# EAGLE board ssm_panelized (EAGLE 8.3.1)
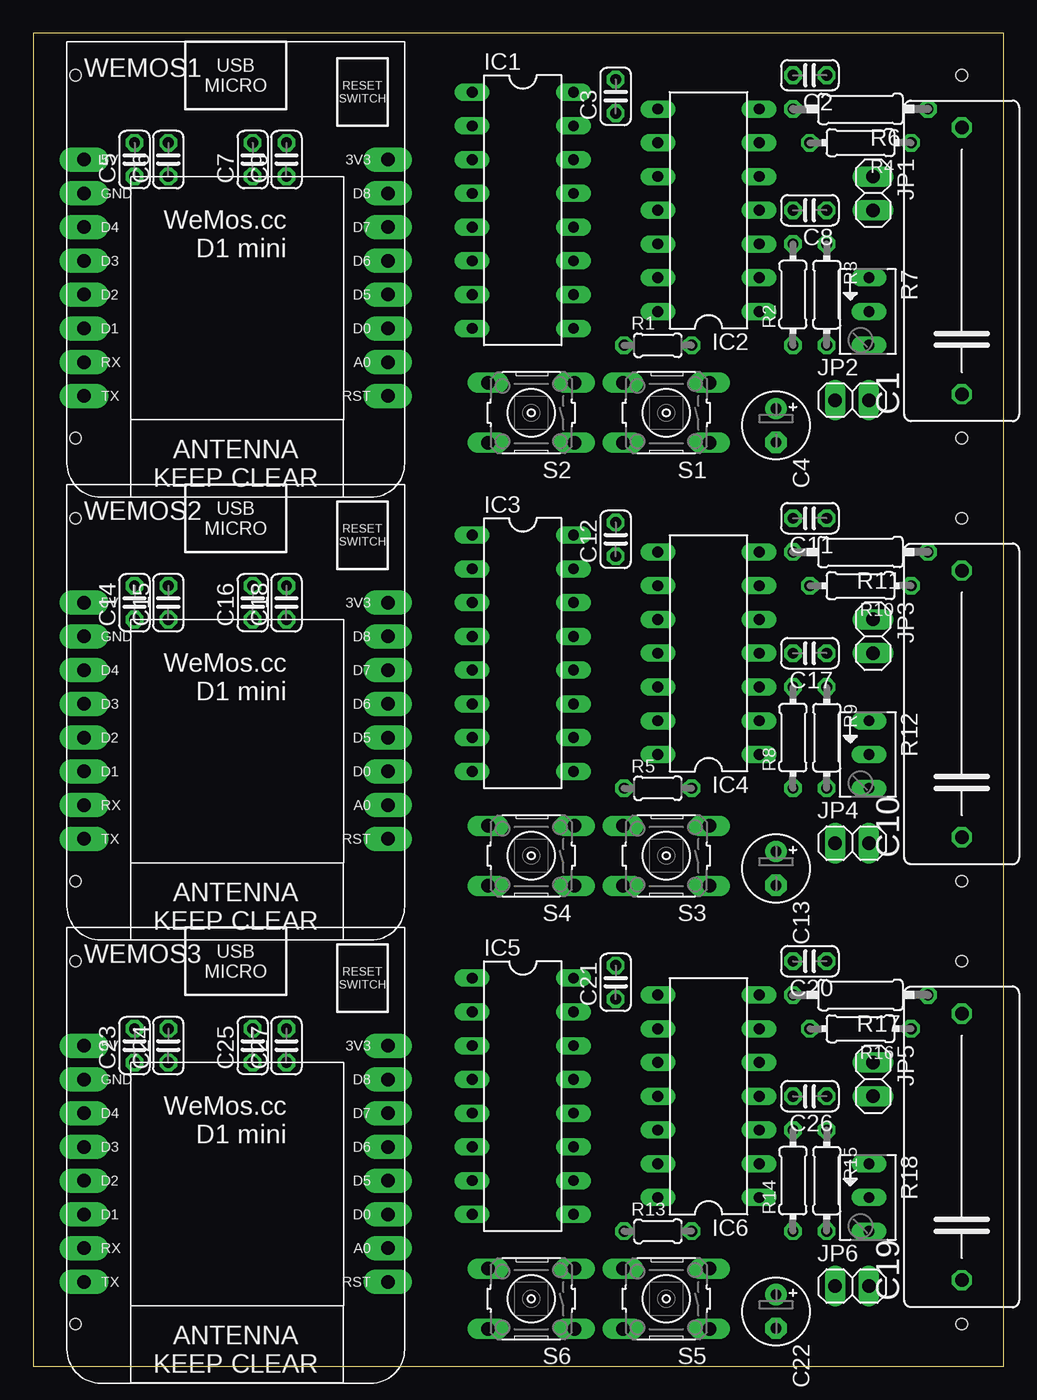
[diagram p0: board, top side]
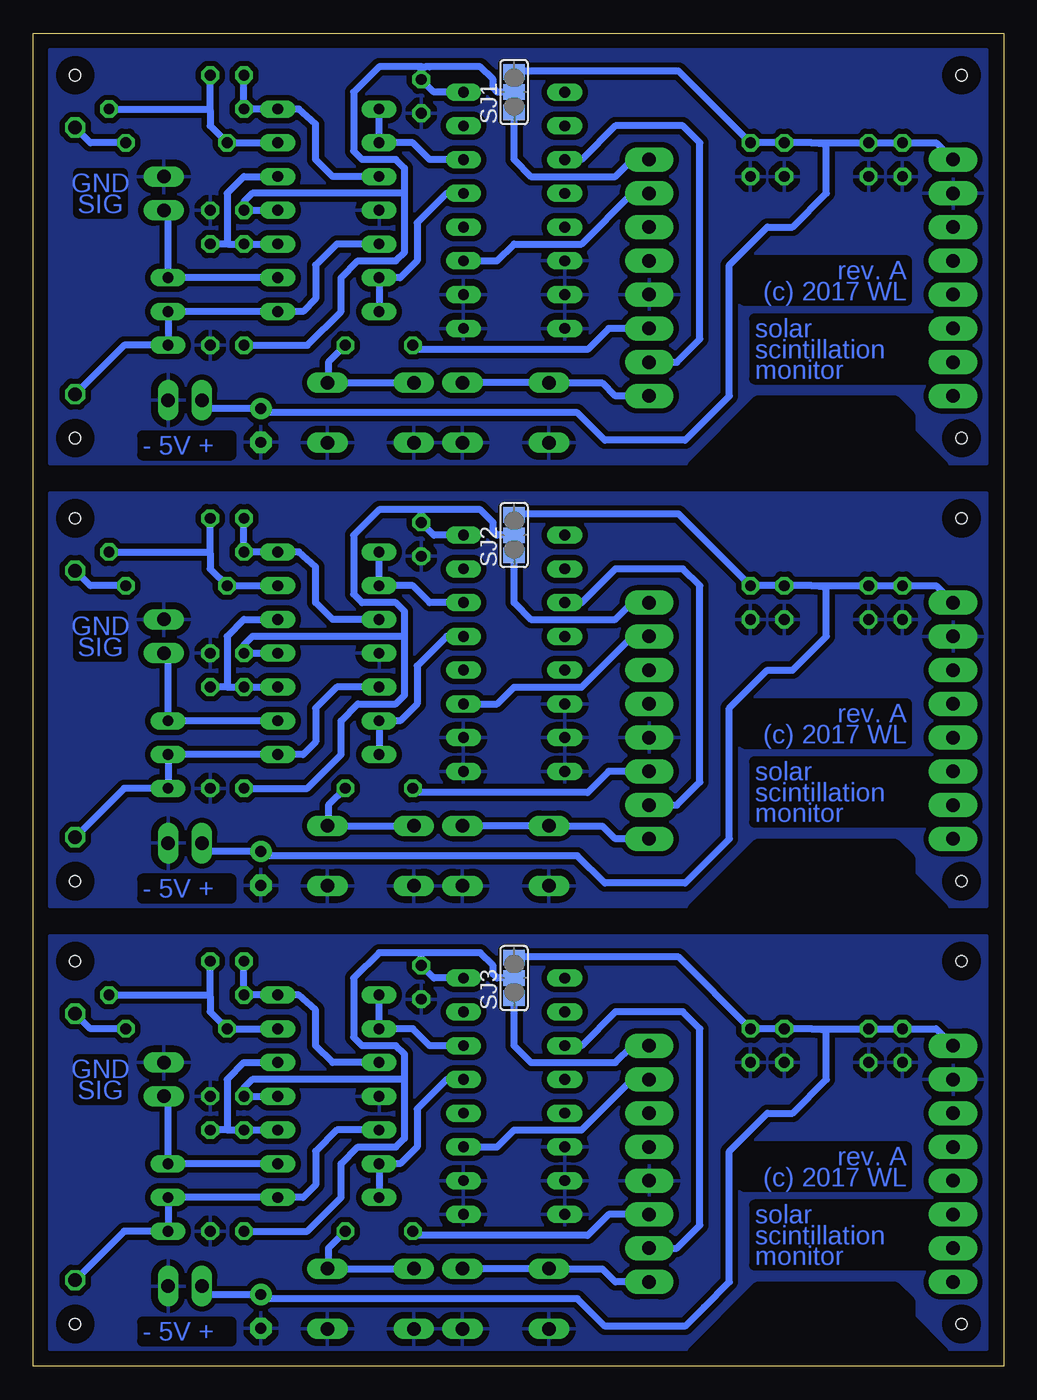
[diagram p1: board, bottom side, seen from below]

Size 73 x 100.32 mm. Coordinates in mm from the lower left corner, seen from the top.
Outline: 0,0 73,0 73,100.32 0,100.32 0,0
Copper layers (1*16): Top 0.035mm / dielectric 1.5mm / Bottom 0.035mm
Design rules "default *": minimum track width 6mil, minimum drill 0.35mm, track to track 6mil, track to pad 6mil, pad to pad 6mil, via to via 6mil, smd to smd 6mil, copper to edge 40mil, drill to drill 6mil, minimum pad ring 10mil, minimum via ring 8mil, stop-mask expansion 4mil, vias tented up to drill 0mil, thermal gap 20mil
Net classes: 0 default: clearance 0.205 mm
Holes 0.85 mm at 3.17,97.16 3.17,69.85 69.85,69.85 69.85,97.16 3.17,63.82 3.17,36.51 69.85,36.51 69.85,63.82 3.17,30.48 3.17,3.17 69.85,3.17 69.85,30.48
bRestrict: area 4.8,67.6 to 23.2,72.4; area 47.6,93 to 47.9,93.3; area 4.8,34.3 to 23.2,39.1; area 47.6,59.7 to 47.9,60; area 4.8,1 to 23.2,5.7; area 47.6,26.4 to 47.9,26.7

## Footprints (pad centres in the part's own frame; a part is rotated, then mirrored left to right if it is on the bottom)
C225-087X210 = drill 1.016 octagon: 1 -11.303,0; 2 8.763,0
C025-024X044 = drill 0.813 octagon: 1 -1.27,0; 2 1.27,0
E2,5-5 = drill 0.813 pad 1.6: + -1.27,0 | drill 0.813 pad 1.6 octagon: - 1.27,0
DIL16 = drill 0.813 long: 1 -8.89,-3.81; 2 -6.35,-3.81; 3 -3.81,-3.81; 4 -1.27,-3.81; 5 1.27,-3.81; 6 3.81,-3.81; 7 6.35,-3.81; 8 8.89,-3.81; 9 8.89,3.81; 10 6.35,3.81; 11 3.81,3.81; 12 1.27,3.81; 13 -1.27,3.81; 14 -3.81,3.81; 15 -6.35,3.81; 16 -8.89,3.81
DIL14 = drill 0.813 long: 1 -7.62,-3.81; 2 -5.08,-3.81; 3 -2.54,-3.81; 4 0,-3.81; 5 2.54,-3.81; 6 5.08,-3.81; 7 7.62,-3.81; 8 7.62,3.81; 9 5.08,3.81; 10 2.54,3.81; 11 0,3.81; 12 -2.54,3.81; 13 -5.08,3.81; 14 -7.62,3.81
1X02 = drill 1.016 long: 1 -1.27,0; 2 1.27,0
0204/5 = drill 0.813 octagon: 1 -2.54,0; 2 2.54,0
0204/7 = drill 0.813 octagon: 1 -3.81,0; 2 3.81,0
0207/10 = drill 0.813 octagon: 1 -5.08,0; 2 5.08,0
B64Y = drill 0.813 long: A 2.54,0; E -2.54,0; S 0,0
B3F-10XX = drill 1.016 long: 1 -3.251,2.261; 2 3.251,2.261; 3 -3.251,-2.261; 4 3.251,-2.261
SJ_2 = smd 1.168 x 1.6: 1 -1.524,0; 2 0,0; 3 1.524,0
WEMOS-D1-MINI = drill 1.016 pad 1.829 long: 3V3 -10.16,-10.16; 5V 12.7,-10.16; A0 -10.16,5.08; D0 -10.16,2.54; D1 12.7,2.54; D2 12.7,0; D3 12.7,-2.54; D4 12.7,-5.08; D5 -10.16,0; D6 -10.16,-2.54; D7 -10.16,-5.08; D8 -10.16,-7.62; GND 12.7,-7.62; RESET -10.16,7.62; RX 12.7,5.08; TX 12.7,7.62

## Placement (x,y rotation side)
C1  3.3u  [C225-087X210]  69.85,84.45 90 top
C2  20p  [C025-024X044]  58.42,97.16 180 top
C3  120p  [C025-024X044]  43.81,95.57 90 top
C4  470u  [E2,5-5]  55.88,70.8 270 top
C5  20p  [C025-024X044]  7.62,90.81 90 top
C6  120p  [C025-024X044]  10.16,90.81 90 top
C7  120p  [C025-024X044]  16.51,90.81 90 top
C8  120p  [C025-024X044]  58.42,87 180 top
C9  120p  [C025-024X044]  19.05,90.81 90 top
C10  3.3u  [C225-087X210]  69.85,51.12 90 top
C11  20p  [C025-024X044]  58.42,63.82 180 top
C12  120p  [C025-024X044]  43.81,62.23 90 top
C13  470u  [E2,5-5]  55.88,37.47 270 top
C14  20p  [C025-024X044]  7.62,57.47 90 top
C15  120p  [C025-024X044]  10.16,57.47 90 top
C16  120p  [C025-024X044]  16.51,57.47 90 top
C17  120p  [C025-024X044]  58.42,53.66 180 top
C18  120p  [C025-024X044]  19.05,57.47 90 top
C19  3.3u  [C225-087X210]  69.85,17.78 90 top
C20  20p  [C025-024X044]  58.42,30.48 180 top
C21  120p  [C025-024X044]  43.81,28.89 90 top
C22  470u  [E2,5-5]  55.88,4.13 270 top
C23  20p  [C025-024X044]  7.62,24.13 90 top
C24  120p  [C025-024X044]  10.16,24.13 90 top
C25  120p  [C025-024X044]  16.51,24.13 90 top
C26  120p  [C025-024X044]  58.42,20.32 180 top
C27  120p  [C025-024X044]  19.05,24.13 90 top
IC1  4051N  [DIL16]  36.83,87 270 top
IC2  MCP604P  [DIL14]  50.8,87 90 top
IC3  4051N  [DIL16]  36.83,53.66 270 top
IC4  MCP604P  [DIL14]  50.8,53.66 90 top
IC5  4051N  [DIL16]  36.83,20.32 270 top
IC6  MCP604P  [DIL14]  50.8,20.32 90 top
JP1  SENS  [1X02]  63.18,88.27 270 top
JP2  PWR  [1X02]  61.59,72.71 0 top
JP3  SENS  [1X02]  63.18,54.93 270 top
JP4  PWR  [1X02]  61.59,39.37 0 top
JP5  SENS  [1X02]  63.18,21.59 270 top
JP6  PWR  [1X02]  61.59,6.03 0 top
R1  470  [0204/5]  46.99,76.83 0 top
R2  10k  [0204/7]  57.15,80.64 90 top
R3  10k  [0204/7]  59.69,80.64 270 top
R4  47k  [0204/7]  62.23,92.08 180 top
R5  470  [0204/5]  46.99,43.5 0 top
R6  20M  [0207/10]  62.23,94.61 180 top
R7  1k  [B64Y]  62.87,79.38 270 top
R8  10k  [0204/7]  57.15,47.31 90 top
R9  10k  [0204/7]  59.69,47.31 270 top
R10  47k  [0204/7]  62.23,58.74 180 top
R11  20M  [0207/10]  62.23,61.28 180 top
R12  1k  [B64Y]  62.87,46.04 270 top
R13  470  [0204/5]  46.99,10.16 0 top
R14  10k  [0204/7]  57.15,13.97 90 top
R15  10k  [0204/7]  59.69,13.97 270 top
R16  47k  [0204/7]  62.23,25.4 180 top
R17  20M  [0207/10]  62.23,27.94 180 top
R18  1k  [B64Y]  62.87,12.7 270 top
S1  FLS  [B3F-10XX]  47.62,71.75 180 top
S2  RST  [B3F-10XX]  37.47,71.75 180 top
S3  FLS  [B3F-10XX]  47.62,38.42 180 top
S4  RST  [B3F-10XX]  37.47,38.42 180 top
S5  FLS  [B3F-10XX]  47.62,5.08 180 top
S6  RST  [B3F-10XX]  37.47,5.08 180 top
SJ1  V  [SJ_2]  36.83,95.89 90 bottom
SJ2  V  [SJ_2]  36.83,62.55 90 bottom
SJ3  V  [SJ_2]  36.83,29.21 90 bottom
WEMOS1  NODEMCU  [WEMOS-D1-MINI]  16.51,80.64 180 top
WEMOS2  NODEMCU  [WEMOS-D1-MINI]  16.51,47.31 180 top
WEMOS3  NODEMCU  [WEMOS-D1-MINI]  16.51,13.97 180 top

## Library data of the parts
C1 C10 C19 = Cap
C2-C9 C11-C18 C20-C27 R1 R5 R6 R11 R13 R17 = rcl
IC1 IC3 IC5 = 40xx
IC2 IC4 IC6 = linear
JP1-JP6 = pinhead
R2-R4 R8-R10 R14-R16 = resistor
R7 R12 R18 = pot
S1-S6 = switch-omron; MPN: B3F-1000; OC_FARNELL: 176432; OC_NEWARK: 36M3542
SJ1-SJ3 = jumper
WEMOS1-WEMOS3 = esp8266modules

## Nets
+3V1: SJ2.1 WEMOS2.3V3
+3V2: SJ3.1 WEMOS3.3V3
+3V3: SJ1.1 WEMOS1.3V3
+5V: C4.+ C5.2 C6.2 C7.2 C9.2 JP2.1 SJ1.3 WEMOS1.5V
+5V1: C13.+ C14.2 C15.2 C16.2 C18.2 JP4.1 SJ2.3 WEMOS2.5V
+5V2: C22.+ C23.2 C24.2 C25.2 C27.2 JP6.1 SJ3.3 WEMOS3.5V
A0: IC1.3 WEMOS1.A0
A1: IC3.3 WEMOS2.A0
A2: IC5.3 WEMOS3.A0
D0: R1.1 WEMOS1.D0
D1: R5.1 WEMOS2.D0
D2: R13.1 WEMOS3.D0
GND: C3.1 C4.- C5.1 C6.1 C7.1 C8.1 C9.1 IC1.6 IC1.7 IC1.8 IC1.9 IC1.10 IC2.11 JP1.1 JP2.2 R3.2 S1.1 S1.2 S2.1 S2.2 WEMOS1.D5 WEMOS1.GND
GND1: C12.1 C13.- C14.1 C15.1 C16.1 C17.1 C18.1 IC3.6 IC3.7 IC3.8 IC3.9 IC3.10 IC4.11 JP3.1 JP4.2 R9.2 S3.1 S3.2 S4.1 S4.2 WEMOS2.D5 WEMOS2.GND
GND2: C21.1 C22.- C23.1 C24.1 C25.1 C26.1 C27.1 IC5.6 IC5.7 IC5.8 IC5.9 IC5.10 IC6.11 JP5.1 JP6.2 R15.2 S5.1 S5.2 S6.1 S6.2 WEMOS3.D5 WEMOS3.GND
N$1: R5.2 S3.3 S3.4
N$2: IC2.2 JP1.2 R7.E
N$3: R1.2 S1.3 S1.4
N$4: IC2.3 IC2.5 R2.2 R3.1
N$5: C1.1 IC2.1 IC2.12 R7.A R7.S
N$6: C1.2 R4.1
N$7: C2.1 IC2.6 R4.2 R6.1
N$8: C2.2 IC2.7 IC2.10 R6.2
N$9: IC4.3 IC4.5 R8.2 R9.1
N$10: IC4.2 JP3.2 R12.E
N$11: C10.1 IC4.1 IC4.12 R12.A R12.S
N$12: C10.2 R10.1
N$13: C11.1 IC4.6 R10.2 R11.1
N$14: C11.2 IC4.7 IC4.10 R11.2
N$15: R13.2 S5.3 S5.4
N$16: IC6.3 IC6.5 R14.2 R15.1
N$17: IC6.2 JP5.2 R18.E
N$18: C19.1 IC6.1 IC6.12 R18.A R18.S
N$19: C19.2 R16.1
N$20: C20.1 IC6.6 R16.2 R17.1
N$21: C20.2 IC6.7 IC6.10 R17.2
NRST: S2.3 S2.4 WEMOS1.RESET
NRST1: S4.3 S4.4 WEMOS2.RESET
NRST2: S6.3 S6.4 WEMOS3.RESET
SEL: IC1.11 WEMOS1.D8
SEL1: IC3.11 WEMOS2.D8
SEL2: IC5.11 WEMOS3.D8
SIG1: IC1.13 IC2.13 IC2.14
SIG2: IC1.14 IC2.8 IC2.9
SIG3: IC3.13 IC4.13 IC4.14
SIG4: IC3.14 IC4.8 IC4.9
SIG5: IC5.13 IC6.13 IC6.14
SIG6: IC5.14 IC6.8 IC6.9
VCC: C3.2 C8.2 IC1.16 IC2.4 R2.1 SJ1.2
VCC1: C12.2 C17.2 IC3.16 IC4.4 R8.1 SJ2.2
VCC2: C21.2 C26.2 IC5.16 IC6.4 R14.1 SJ3.2

## Tracks (layer width: path | path; a pad name or v marks a point on that pad's centre or on a via)
+3V1
  Bottom 0.508: SJ2.1 36.83,57.47 35.56,56.2 29.21,56.2 27.94,57.47 WEMOS2.3V3
+3V2
  Bottom 0.508: SJ3.1 36.83,24.13 35.56,22.86 29.21,22.86 27.94,24.13 WEMOS3.3V3
+3V3
  Bottom 0.508: SJ1.1 36.83,90.81 35.56,89.53 29.21,89.53 27.94,90.81 WEMOS1.3V3
+5V
  Bottom 0.508: SJ1.3 36.77,97.47 24.45,97.47 C9.2 C7.2 14.47,92.08 | 14.47,92.08 C6.2 C5.2 5.08,92.08 WEMOS1.5V | 14.47,92.08 13.34,91.94 13.34,88.27 15.88,85.72 17.78,85.72 20.64,82.87 20.64,73.03 22.54,71.12 23.97,69.69 30.01,69.69 32.07,71.75 55.56,71.75 C4.+ 59.69,72.07 JP2.1
+5V1
  Bottom 0.508: SJ2.3 36.77,64.14 24.45,64.14 C18.2 C16.2 14.47,58.74 | 14.47,58.74 C15.2 C14.2 5.08,58.74 WEMOS2.5V | 14.47,58.74 13.34,58.6 13.34,54.93 15.88,52.39 17.78,52.39 20.64,49.53 20.64,39.69 22.54,37.79 23.97,36.36 30.01,36.36 32.07,38.42 55.56,38.42 C13.+ 59.69,38.73 JP4.1
+5V2
  Bottom 0.508: SJ3.3 36.77,30.8 24.45,30.8 C27.2 C25.2 14.47,25.4 | 14.47,25.4 C24.2 C23.2 5.08,25.4 WEMOS3.5V | 14.47,25.4 13.34,25.26 13.34,21.59 15.88,19.05 17.78,19.05 20.64,16.19 20.64,6.35 22.54,4.45 23.97,3.02 30.01,3.02 32.07,5.08 55.56,5.08 C22.+ 59.69,5.4 JP6.1
A0
  Bottom 0.508: IC1.3 31.75,90.81 29.21,93.34 24.13,93.34 22.86,92.08 22.86,77.3 24.59,75.56 WEMOS1.A0
A1
  Bottom 0.508: IC3.3 31.75,57.47 29.21,60.01 24.13,60.01 22.86,58.74 22.86,43.96 24.59,42.23 WEMOS2.A0
A2
  Bottom 0.508: IC5.3 31.75,24.13 29.21,26.67 24.13,26.67 22.86,25.4 22.86,10.62 24.59,8.89 WEMOS3.A0
D0
  Bottom 0.508: R1.1 44.13,76.52 31.3,76.52 29.71,78.11 WEMOS1.D0
D1
  Bottom 0.508: R5.1 44.13,43.18 31.3,43.18 29.71,44.77 WEMOS2.D0
D2
  Bottom 0.508: R13.1 44.13,9.84 31.3,9.84 29.71,11.43 WEMOS3.D0
GND
  pour Bottom (isolate 0.406): 1.27,99.06 1.27,67.94 71.75,67.94 71.75,99.06
GND1
  pour Bottom (isolate 0.406): 1.27,65.72 1.27,34.61 71.75,34.61 71.75,65.72
GND2
  pour Bottom (isolate 0.406): 1.27,32.38 1.27,1.27 71.75,1.27 71.75,32.38
N$1
  Bottom 0.508: R5.2 50.8,42.23 50.8,41.39 S3.3 S3.4
N$2
  Bottom 0.508: 63.5,87 JP1.2 62.87,86.68 R7.E IC2.2
N$3
  Bottom 0.508: R1.2 50.8,75.56 50.8,74.73 S1.3 S1.4
N$4
  Bottom 0.508: IC2.5 57.15,89.53 58.42,88.27 58.42,84.49 58.38,84.45 | IC2.3 R2.2 58.38,84.45 | 58.38,84.45 R3.1
N$5
  Bottom 0.508: IC2.12 50.16,84.45 51.75,82.87 51.75,80.33 52.7,79.38 IC2.1 R7.S R7.A 66.17,76.83 C1.1
N$6
  Bottom 0.508: R4.1 68.71,92.08 C1.2
N$7
  Bottom 0.508: IC2.6 R4.2 59.69,93.34 59.69,94.52 | 59.69,94.52 C2.1 | R6.1 59.79,94.61 59.69,94.52
N$8
  Bottom 0.508: 55.88,94.61 IC2.7 | 48.26,89.53 IC2.10 50.48,89.53 51.75,90.81 51.75,93.48 53.02,94.61 IC2.7 | IC2.7 R6.2 C2.2
N$9
  Bottom 0.508: IC4.5 57.15,56.2 58.42,54.93 58.42,51.15 58.38,51.12 | IC4.3 R8.2 58.38,51.12 | 58.38,51.12 R9.1
N$10
  Bottom 0.508: 63.5,53.66 JP3.2 62.87,53.34 R12.E IC4.2
N$11
  Bottom 0.508: IC4.12 50.16,51.12 51.75,49.53 51.75,46.99 52.7,46.04 IC4.1 R12.S R12.A 66.17,43.5 C10.1
N$12
  Bottom 0.508: R10.1 68.71,58.74 C10.2
N$13
  Bottom 0.508: IC4.6 R10.2 59.69,60.01 59.69,61.18 | 59.69,61.18 C11.1 | R11.1 59.79,61.28 59.69,61.18
N$14
  Bottom 0.508: 55.88,61.28 IC4.7 | 48.26,56.2 IC4.10 50.48,56.2 51.75,57.47 51.75,60.15 53.02,61.28 IC4.7 | IC4.7 R11.2 C11.2
N$15
  Bottom 0.508: R13.2 50.8,8.89 50.8,8.05 S5.3 S5.4
N$16
  Bottom 0.508: IC6.5 57.15,22.86 58.42,21.59 58.42,17.82 58.38,17.78 | IC6.3 R14.2 58.38,17.78 | 58.38,17.78 R15.1
N$17
  Bottom 0.508: 63.5,20.32 JP5.2 62.87,20 R18.E IC6.2
N$18
  Bottom 0.508: IC6.12 50.16,17.78 51.75,16.19 51.75,13.65 52.7,12.7 IC6.1 R18.S R18.A 66.17,10.16 C19.1
N$19
  Bottom 0.508: R16.1 68.71,25.4 C19.2
N$20
  Bottom 0.508: IC6.6 R16.2 59.69,26.67 59.69,27.84 | 59.69,27.84 C20.1 | R17.1 59.79,27.94 59.69,27.84
N$21
  Bottom 0.508: 55.88,27.94 IC6.7 | 48.26,22.86 IC6.10 50.48,22.86 51.75,24.13 51.75,26.81 53.02,27.94 IC6.7 | IC6.7 R17.2 C20.2
NRST
  Bottom 0.508: S2.3 S2.4 34.18,73.98 30.16,73.98 29.21,73.03 WEMOS1.RESET
NRST1
  Bottom 0.508: S4.3 S4.4 34.18,40.64 30.16,40.64 29.21,39.69 WEMOS2.RESET
NRST2
  Bottom 0.508: S6.3 S6.4 34.18,7.3 30.16,7.3 29.21,6.35 WEMOS3.RESET
SEL
  Bottom 0.508: IC1.11 38.1,83.19 36.83,84.45 31.75,84.45 27.94,88.27 WEMOS1.D8
SEL1
  Bottom 0.508: IC3.11 38.1,49.85 36.83,51.12 31.75,51.12 27.94,54.93 WEMOS2.D8
SEL2
  Bottom 0.508: IC5.11 38.1,16.51 36.83,17.78 31.75,17.78 27.94,21.59 WEMOS3.D8
SIG1
  Bottom 0.508: IC2.14 IC2.13 45.4,81.92 44.13,83.19 44.13,86.04 41.91,88.27 IC1.13
SIG2
  Bottom 0.508: IC1.14 43.18,90.81 44.45,92.08 IC2.9 IC2.8
SIG3
  Bottom 0.508: IC4.14 IC4.13 45.4,48.58 44.13,49.85 44.13,52.7 41.91,54.93 IC3.13
SIG4
  Bottom 0.508: IC3.14 43.18,57.47 44.45,58.74 IC4.9 IC4.8
SIG5
  Bottom 0.508: IC6.14 IC6.13 45.4,15.24 44.13,16.51 44.13,19.37 41.91,21.59 IC5.13
SIG6
  Bottom 0.508: IC5.14 43.18,24.13 44.45,25.4 IC6.9 IC6.8
VCC
  Bottom 0.508: 45.09,88.27 45.09,90.17 45.72,90.81 48.26,90.81 48.9,91.44 48.9,95.89 46.99,97.79 43.76,97.79 | 45.09,88.27 45.09,83.82 45.72,83.19 48.58,83.19 49.85,81.92 49.85,79.38 52.39,76.83 R2.1 | 57.07,87 IC2.4 | 57.07,87 C8.2 | SJ1.2 38.1,95.89 38.42,96.2 38.42,96.84 39.37,97.79 43.18,97.79 43.5,97.79 43.76,97.79 | 57.07,87 57.15,87.08 57.15,87.63 56.52,88.27 45.09,88.27 | 43.76,97.79 43.81,97.73 C3.2 42.86,95.89 IC1.16
VCC1
  Bottom 0.508: 45.09,54.93 45.09,56.83 45.72,57.47 48.26,57.47 48.9,58.1 48.9,62.55 46.99,64.45 43.76,64.45 | 45.09,54.93 45.09,50.48 45.72,49.85 48.58,49.85 49.85,48.58 49.85,46.04 52.39,43.5 R8.1 | 57.07,53.66 IC4.4 | 57.07,53.66 C17.2 | SJ2.2 38.1,62.55 38.42,62.87 38.42,63.5 39.37,64.45 43.76,64.45 | 57.07,53.66 57.15,53.74 57.15,54.29 56.52,54.93 45.09,54.93 | 43.76,64.45 43.81,64.39 C12.2 42.86,62.55 IC3.16
VCC2
  Bottom 0.508: 45.09,21.59 45.09,23.5 45.72,24.13 48.26,24.13 48.9,24.77 48.9,29.21 46.99,31.11 43.76,31.11 | 45.09,21.59 45.09,17.14 45.72,16.51 48.58,16.51 49.85,15.24 49.85,12.7 52.39,10.16 R14.1 | 57.07,20.32 IC6.4 | 57.07,20.32 C26.2 | SJ3.2 38.1,29.21 38.42,29.53 38.42,30.16 39.37,31.11 43.76,31.11 | 57.07,20.32 57.15,20.4 57.15,20.95 56.52,21.59 45.09,21.59 | 43.76,31.11 43.81,31.06 C21.2 42.86,29.21 IC5.16

## Text on the board
Bottom: GND / SIG | rev. A / (c) 2017 WL | solar / scintillation / monitor | - 5V + | GND / SIG | rev. A / (c) 2017 WL | solar / scintillation / monitor | - 5V + | GND / SIG | rev. A / (c) 2017 WL | solar / scintillation / monitor | - 5V +
tValues: GND / SIG | + 5V - | GND / SIG | + 5V - | GND / SIG | + 5V -